# Altium PCB PCB2.PcbDoc
Units mm, origin at the board's own origin, x right, y up, seen from the top; angles counter-clockwise.
Board outline 160 x 110 mm, 2 copper layers (Top Layer, Bottom Layer), stack 1.895 mm thick; 57 components, 72 nets, 172 pads, 41 vias.
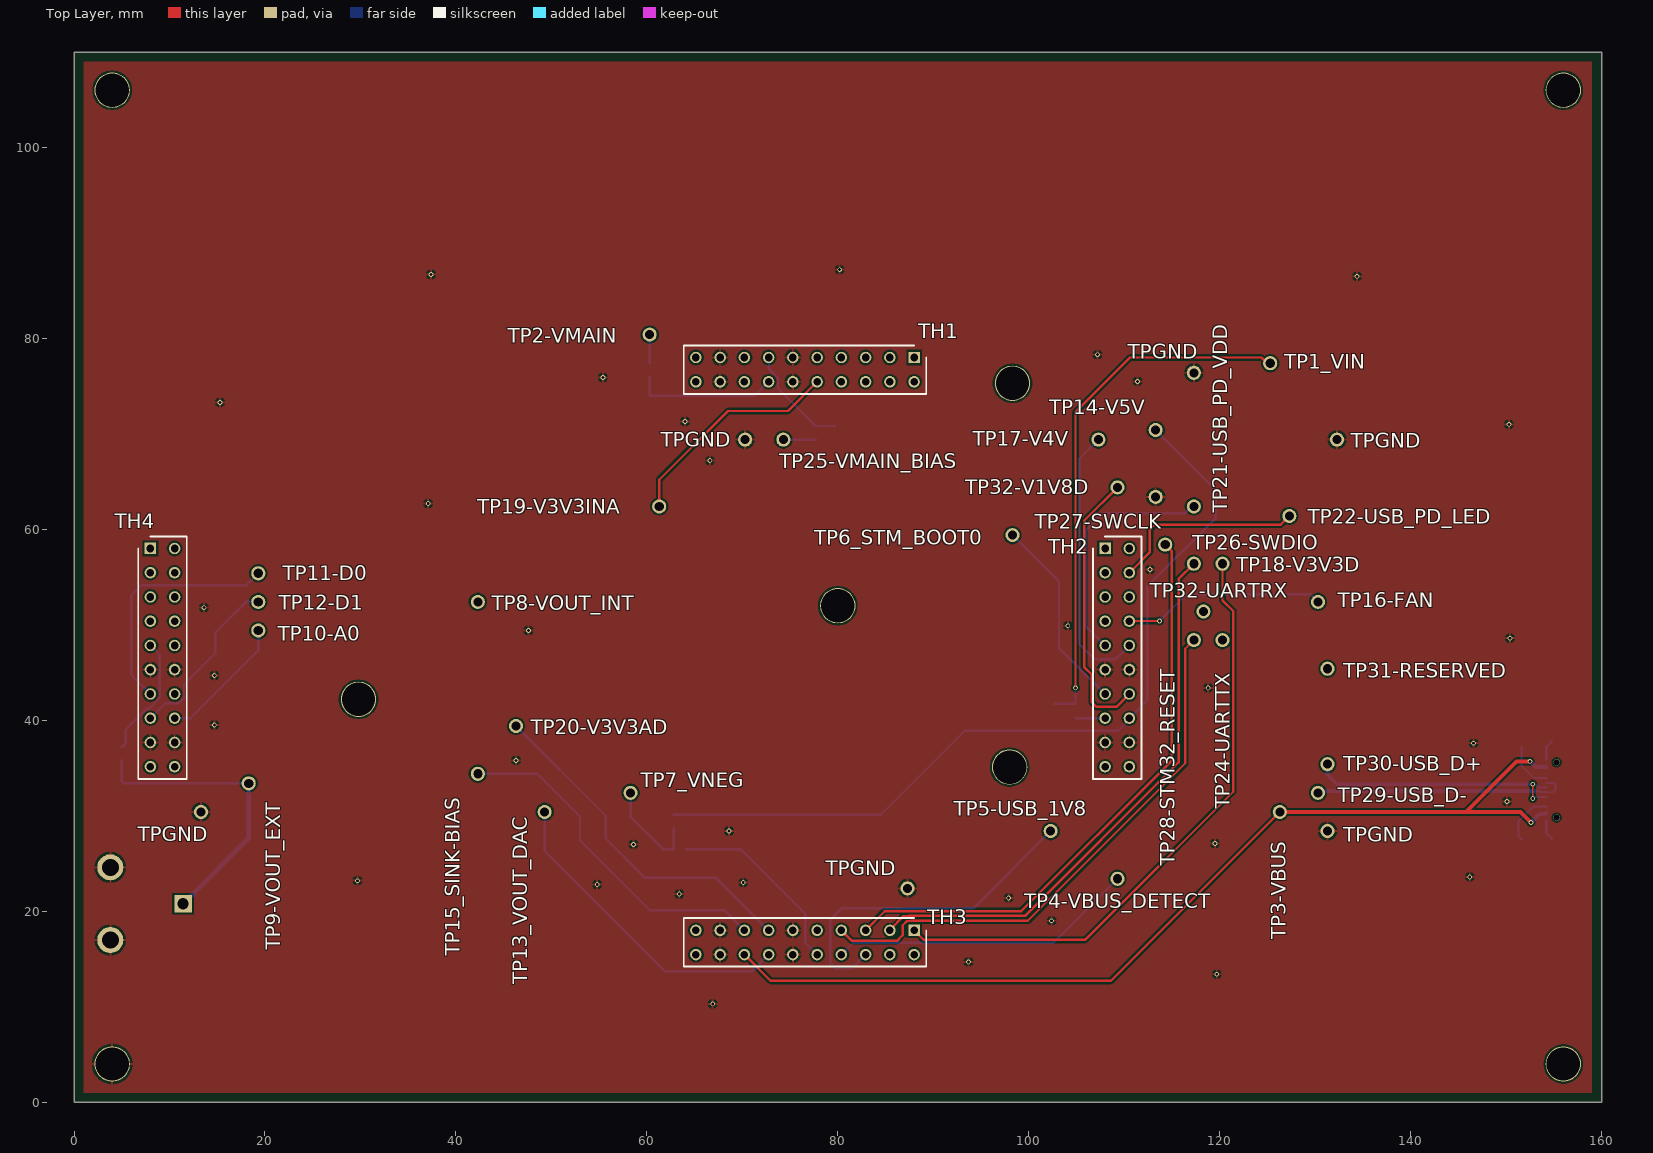
[diagram p0: Top Layer view]
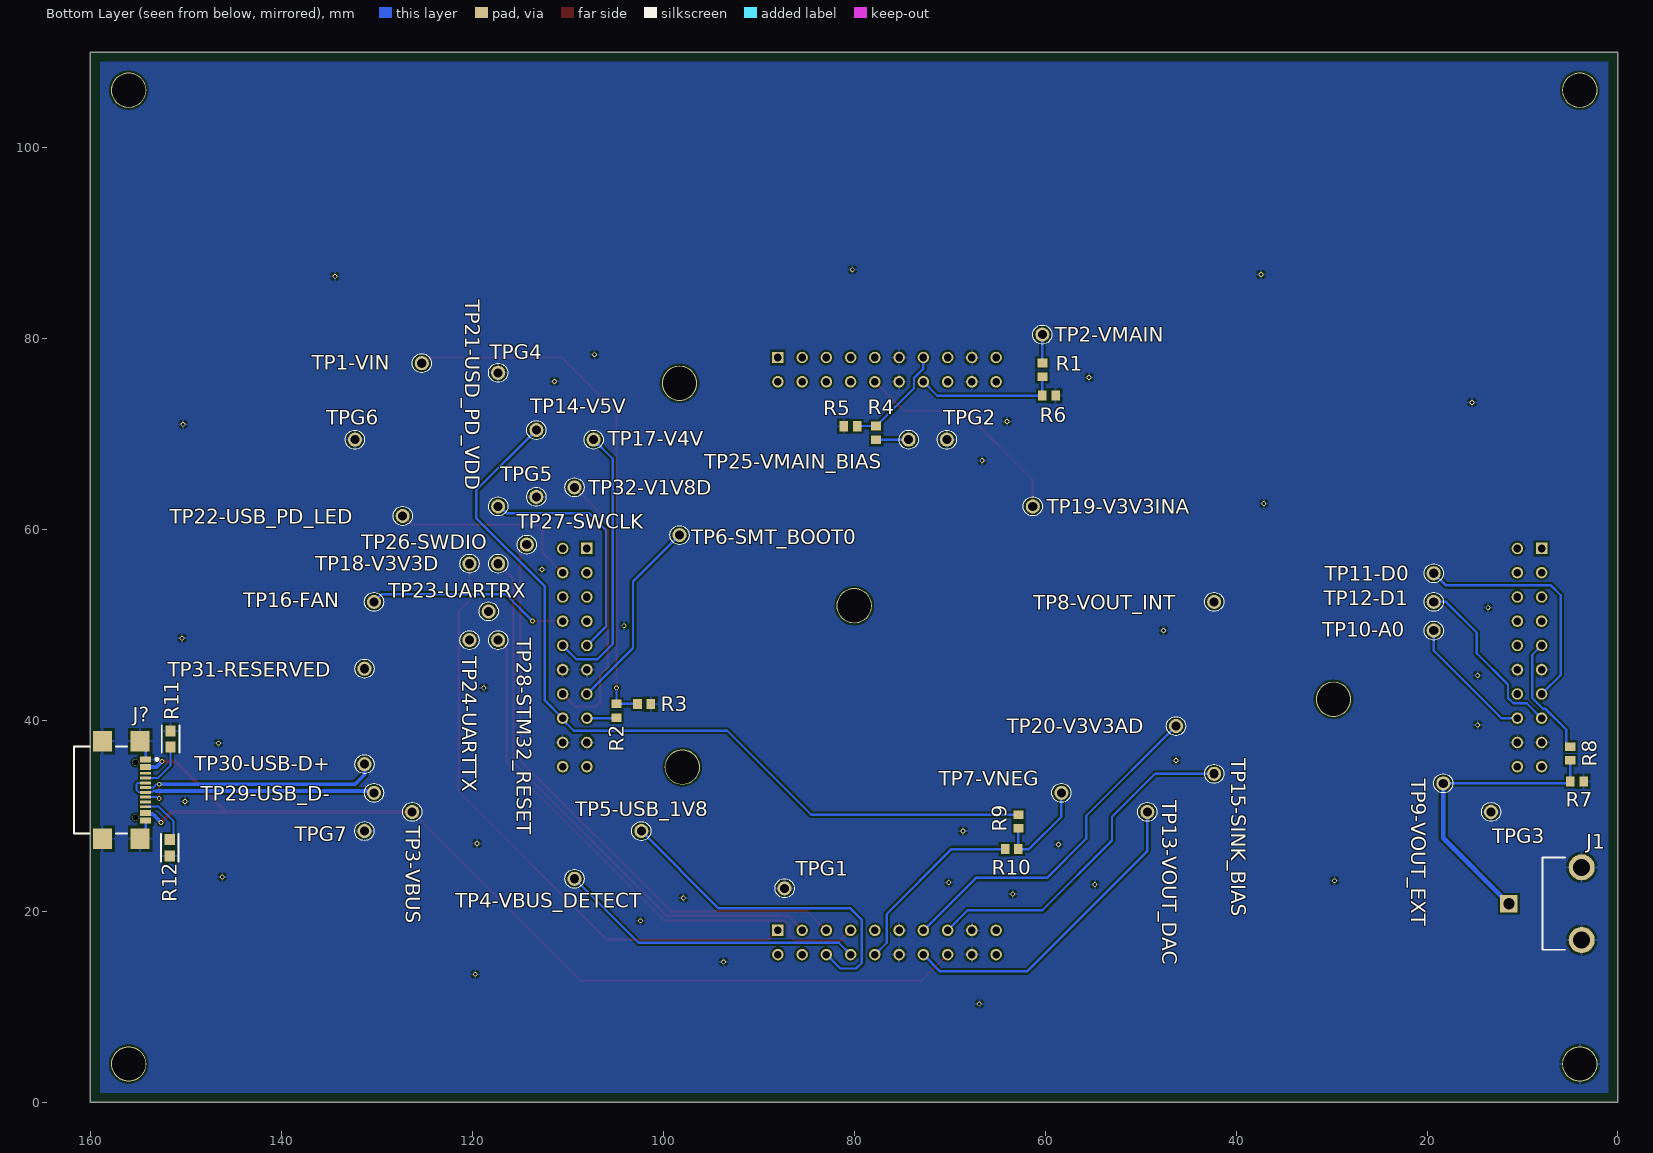
[diagram p1: Bottom Layer view, seen from below]
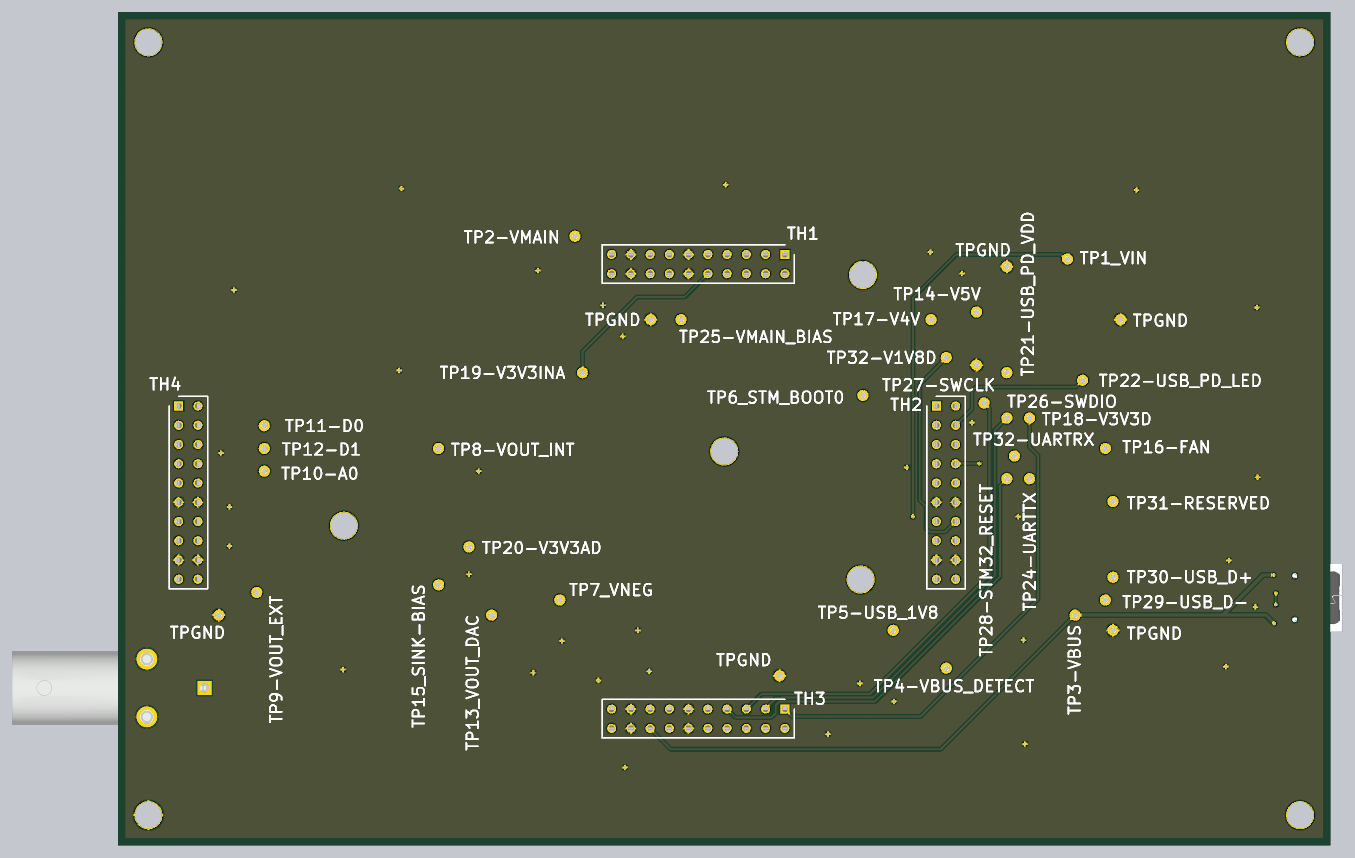
[diagram p2: 3D render of the assembled board from above, using the file's embedded part models]
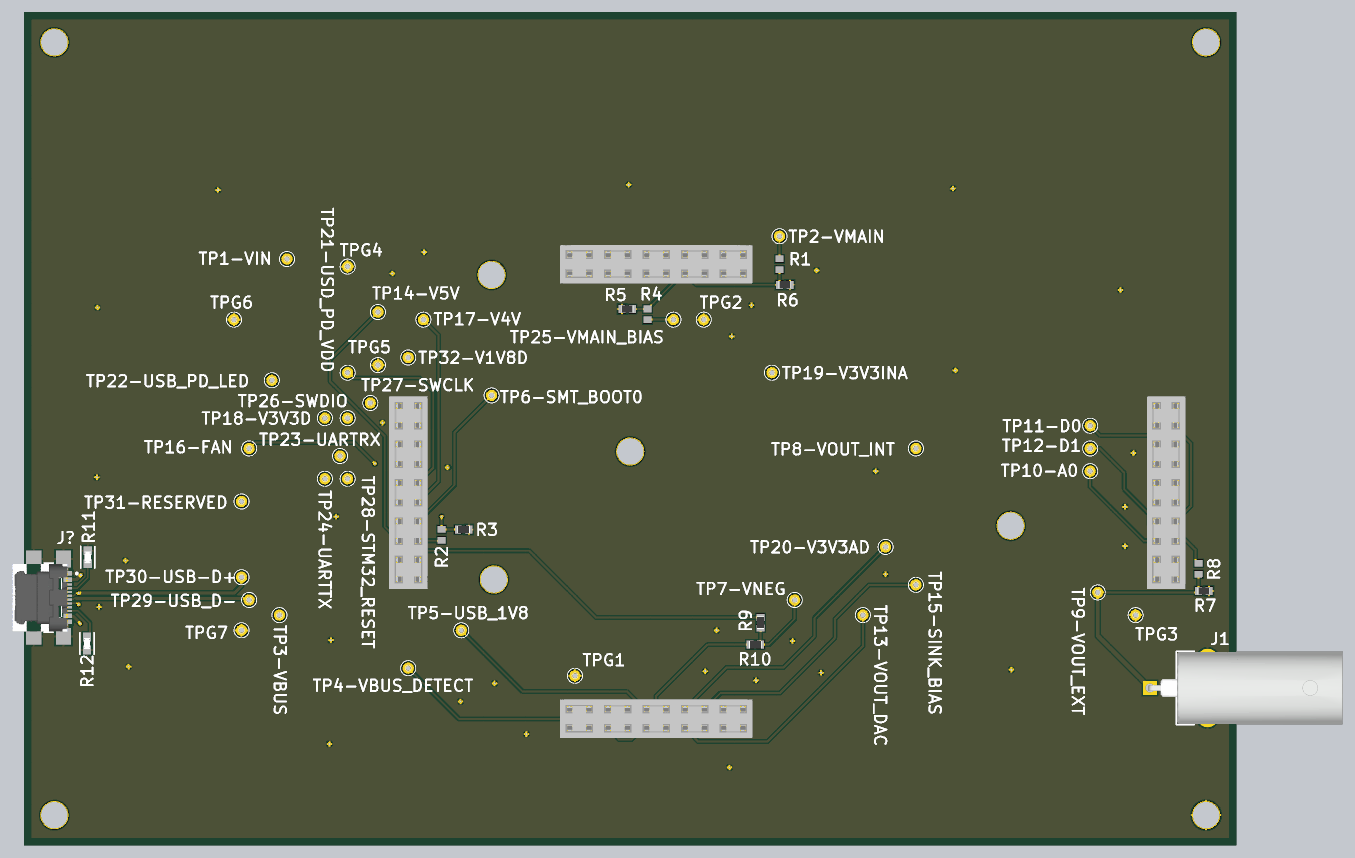
[diagram p3: 3D render of the assembled board from below, using the file's embedded part models]

## Layer stack, top to bottom
Top Solder: solder mask 0.0102, Solder Resist, Dk 3.5
Top Layer: signal copper 0.0152
Dielectric 1: dielectric 1.865, FR-4, Dk 4.8
Bottom Layer: signal copper 0.0152
Bottom Solder: solder mask 0.0102, Solder Resist, Dk 3.5

## Board outline
0,0 0,110 160,110 160,0

## Design rules (kind name [scope] priority, off if disabled: settings)
Clearance [All] p1: gap=0.2 ignorepadtopadclearanceinfootprint=FALSE except(0.12: Arc-Arc Arc-Track Track-Track)
DiffPairsRouting [All] p1: maxlimit=0.6 minlimit=0.1 mostfreqgap=0.2 toplayer_minwidth=0.1 toplayer_maxwidth=0.6 toplayer_prefwidth=0.12 bottomlayer_minwidth=0.1 bottomlayer_maxwidth=0.6 bottomlayer_prefwidth=0.12 maxuncoupledlength=12.7
HoleSize [All] p1: absolutevalues=TRUE maxlimit=4 minlimit=0.025 maxpercent=80.000 minpercent=20.000
MinimumSolderMaskSliver [All] p1: minsoldermaskwidth=0.2
PolygonConnect [All] p1: connectstyle=Relief reliefconductorwidth=0.254 reliefentries=4 polygonreliefangle="90 Angle" airgapwidth=0.254
RoutingVias [All] p1: holewidth=0.3 width=0.5 viastyle="Through Hole" minholewidth=0.3 minwidth=0.5 maxholewidth=0.3 maxwidth=0.5
SilkToSilkClearance [All] p1: silktosilkclearance=0.2
SilkToSolderMaskClearance [IsPad] p1: minsilkscreentomaskgap=0.2 clearancetoexposedcopper=TRUE
SolderMaskExpansion [All] p1: expansion=0.102 istentingtop=FALSE
SupplyNets "Schematic Supply Nets" [InNet('GND')] p1: voltage=0.000
Width [All] p1: maxlimit=0.6 minlimit=0.12 preferedwidth=0.2
25 further rules are at their usual default settings.

## Classes and differential pairs
component class U_TH4: TH4
component class U_TH3: TH3
component class U_TH2: TH2
component class U_TH1: TH1
component class Top: J1 J? R1 R2 R3 R4 R5 R6 R7 R8 R9 R10 R11 R12 TP1-VIN TP2-VMAIN TP3-VBUS TP4-VBUS_DETECT TP5-USB_1V8 TP6-SMT_BOOT0 TP7-VNEG TP8-VOUT_INT TP9-VOUT_EXT TP10-A0 TP11-D0 TP12-D1 TP13-VOUT_DAC TP14-V5V TP15-SINK_BIAS TP16-FAN TP17-V4V TP18-V3V3D TP19-V3V3INA TP20-V3V3AD TP21-USD_PD_VDD TP22-USB_PD_LED TP23-UARTRX TP24-UARTTX TP25-VMAIN_BIAS TP26-SWDIO TP27-SWCLK TP28-STM32_RESET TP29-USB_D- TP30-USB-D+ TP31-RESERVED TP32-V1V8D TPG1 TPG2 TPG3 TPG4 TPG5 TPG6 TPG7
differential pair USB: +USB_P -USB_N

## Components (designator, comment, footprint, x,y, rotation, side; value= is the part's Value field where it differs from the comment)
J1 "5414373-1" FP-5414373-1-MFG -3.06,20.79 r90 bottom
J? "USB4110-GF-A" FP-USB4110-GF-A-MFG 157.9,32.7 r270 bottom
R1 "ERJ-3EKF2002V" RESC1608X55X30ML15T15 60.3,76.7 r270 bottom
R2 "ERJ-3EKF2002V" RESC1608X55X30ML15T15 104.9,41 r90 bottom
R3 "CRCW060310K0FKEA" RESC1609X50X30ML8T20 102,41.7 r0 bottom
R4 "ERJ-3EKF2002V" RESC1608X55X30ML15T15 77.7,70.1 r90 bottom
R5 "CRCW060310K0FKEA" RESC1609X50X30ML8T20 80.4,70.8 r180 bottom
R6 "CRCW060310K0FKEA" RESC1609X50X30ML8T20 59.6,74 r0 bottom
R7 "CRCW060310K0FKEA" RESC1609X50X30ML8T20 4.3,33.6 r0 bottom
R8 "ERJ-3EKF2002V" RESC1608X55X30ML15T15 5,36.525 r270 bottom
R9 "CRCW060310K0FKEA" RESC1609X50X30ML8T20 62.8,29.4 r270 bottom
R10 "CRCW060310K0FKEA" RESC1609X50X30ML8T20 63.5,26.5 r180 bottom
R11 "ERJ-3EKF5101V" FP-ERJ3EK-IPC_A 151.6,38.049 r270 bottom
R12 "ERJ-3EKF5101V" FP-ERJ3EK-IPC_A 151.7,26.651 r90 bottom
TH1 "90151-2120" RHDR20W60P254_2X10_2540X498X870P 88,78 r180 top
TH2 "90151-2120" RHDR20W60P254_2X10_2540X498X870P 108,58 r270 top
TH3 "90151-2120" RHDR20W60P254_2X10_2540X498X870P 88,18 r180 top
TH4 "90151-2120" RHDR20W60P254_2X10_2540X498X870P 8,58 r270 top
TP1-VIN "S13-503" S13503 125.3,77.4 r90 bottom
TP2-VMAIN "S13-503" S13503 60.3,80.4 r90 bottom
TP3-VBUS "S13-503" S13503 126.3,30.4 r90 bottom
TP4-VBUS_DETECT "S13-503" S13503 109.3,23.4 r90 bottom
TP5-USB_1V8 "S13-503" S13503 102.3,28.4 r90 bottom
TP6-SMT_BOOT0 "S13-503" S13503 98.3,59.4 r90 bottom
TP7-VNEG "S13-503" S13503 58.3,32.4 r90 bottom
TP8-VOUT_INT "S13-503" S13503 42.3,52.4 r90 bottom
TP9-VOUT_EXT "S13-503" S13503 18.3,33.4 r90 bottom
TP10-A0 "S13-503" S13503 19.3,49.4 r90 bottom
TP11-D0 "S13-503" S13503 19.3,55.4 r90 bottom
TP12-D1 "S13-503" S13503 19.3,52.4 r90 bottom
TP13-VOUT_DAC "S13-503" S13503 49.3,30.4 r90 bottom
TP14-V5V "S13-503" S13503 113.3,70.4 r90 bottom
TP15-SINK_BIAS "S13-503" S13503 42.3,34.4 r90 bottom
TP16-FAN "S13-503" S13503 130.3,52.4 r90 bottom
TP17-V4V "S13-503" S13503 107.3,69.4 r90 bottom
TP18-V3V3D "S13-503" S13503 120.3,56.4 r90 bottom
TP19-V3V3INA "S13-503" S13503 61.3,62.4 r90 bottom
TP20-V3V3AD "S13-503" S13503 46.3,39.4 r90 bottom
TP21-USD_PD_VDD "S13-503" S13503 117.3,62.4 r90 bottom
TP22-USB_PD_LED "S13-503" S13503 127.3,61.4 r90 bottom
TP23-UARTRX "S13-503" S13503 118.3,51.4 r90 bottom
TP24-UARTTX "S13-503" S13503 120.3,48.4 r90 bottom
TP25-VMAIN_BIAS "S13-503" S13503 74.3,69.4 r90 bottom
TP26-SWDIO "S13-503" S13503 117.3,56.4 r90 bottom
TP27-SWCLK "S13-503" S13503 114.3,58.4 r90 bottom
TP28-STM32_RESET "S13-503" S13503 117.3,48.4 r90 bottom
TP29-USB_D- "S13-503" S13503 130.3,32.4 r90 bottom
TP30-USB-D+ "S13-503" S13503 131.3,35.4 r90 bottom
TP31-RESERVED "S13-503" S13503 131.3,45.4 r90 bottom
TP32-V1V8D "S13-503" S13503 109.3,64.4 r90 bottom
TPG1 "S13-503" S13503 87.3,22.4 r180 bottom
TPG2 "S13-503" S13503 70.3,69.4 r180 bottom
TPG3 "S13-503" S13503 13.3,30.4 r180 bottom
TPG4 "S13-503" S13503 117.3,76.4 r180 bottom
TPG5 "S13-503" S13503 113.3,63.4 r180 bottom
TPG6 "S13-503" S13503 132.3,69.4 r180 bottom
TPG7 "S13-503" S13503 131.3,28.4 r180 bottom

## Footprints (in the part's own frame and the unit in brackets; to place one, negate y for a bottom-side part, rotate by r counter-clockwise, add the part's x,y. Pads: shape width x height; smd on the part's side, far side on the other; paste and mask are expansions set on the pad)
FP-5414373-1-MFG [mm]
  rect 1.84x1.84 hole 1.19 paste-2539.97 mask+0: 1(0,14.48)
  round 2.73 hole 1.78 paste-2539.97 mask+0: 2(-3.81,6.86) 3(3.81,6.86)
  silkscreen extent -4.83,8.6 4.83,10.98, body extent -4.83,-10.92 4.83,14.63, height 9.34
FP-ERJ3EK-IPC_A [mil]
  rect 45.53x41.82 smd paste+0 mask+0: 1(-33.5,0) 2(33.5,0)
  silkscreen extent -56,-37 56,37, body extent -31,-16 31,16, height 22
FP-USB4110-GF-A-MFG [mm]
  rect 2.18x2 smd paste+0 mask+0: 1(-5.11,3.105) 2(5.11,3.105) 3(-5.11,-0.825) 4(5.11,-0.825)
  rect 0.6x1.15 smd paste+0 mask+0: A1-B12(-3.2,3.68) A4-B9(-2.4,3.68) B1-A12(3.2,3.68) B4-A9(2.4,3.68)
  rect 0.3x1.15 smd paste+0 mask+0: A5(-1.25,3.68) A6(-0.25,3.68) A7(0.25,3.68) A8(1.25,3.68) B5(1.75,3.68) B6(0.75,3.68) B7(-0.75,3.68) B8(-1.75,3.68)
  round 0.65 hole 0.65 unplated paste-2539.97 mask+0: ""(-2.89,2.605) ""(2.89,2.605)
  silkscreen extent -4.57,-3.83 4.57,4.99, body extent -5.65,-3.67 5.65,4.01, height 3.21
RESC1608X55X30ML15T15 [mm] "Chip Resistor, 2-Leads, Body 1.60x0.80mm, IPC Low Density"
  rect 0.9x1.05 smd: 1(-0.725,0) 2(0.725,0)
  body extent -0.87,-0.48 0.87,0.48, height 0.55
RESC1609X50X30ML8T20 [mm] "Chip Resistor, 2-Leads, Body 1.65x0.95mm, IPC Low Density"
  rect 0.9x1.05 smd: 1(-0.7,0) 2(0.7,0)
  body extent -0.82,-0.48 0.82,0.48, height 0.5
RHDR20W60P254_2X10_2540X498X870P [mm]
  rect 1.2x1.2 hole 0.8: 1(0,0)
  round 1.2 hole 0.8: 2(0,2.54) 3(2.54,0) 4(2.54,2.54) 5(5.08,0) 6(5.08,2.54) 7(7.62,0) 8(7.62,2.54) 9(10.16,0) 10(10.16,2.54) 11(12.7,0) 12(12.7,2.54) 13(15.24,0) 14(15.24,2.54) 15(17.78,0) 16(17.78,2.54) 17(20.32,0) 18(20.32,2.54) 19(22.86,0) 20(22.86,2.54)
  silkscreen extent -1.27,-1.27 24.13,3.81, body extent -1.27,-1.27 24.13,3.81, height 8.38
S13503 [mm]
  round 1.478 hole 0.95: 1(0,0)
  silkscreen extent -1,-1 1,1, body extent -0.48,-0.49 0.48,0.49, height 2.2

## Part data
J1: library part CMP-03357-000008-1, "CONN BNC JACK R/A 50 OHM PCB", Dielectric Material=Polymethylpentene, Frequency=4GHz, Housing Color=Silver, Insulation Resistance=5GR, Max Operating Temperature=85°C, Min Operating Temperature=-55°C, Operating Frequency="0 to 4 GHz", Package Quantity=50, Voltage Rating=500V, Body Material=Zinc, Body Plating=Nickel, Center Contact Plating=Gold, Connector Type=BNC, Contact Material=Bronze, Contact Plating=Gold, Fastening Type=Bayonet, Gender=Female, Impedance=50R, Insulation Material=Polymethylpentene, Length=25.4mm, Mating Cycles=500, Max Frequency=4GHz, Mount="Through Hole", Number of Ports=1, Number of Positions=1, Orientation="Right Angle", Packaging=Tray, PCB Mount Retention=Without, PCB Mounting Orientation="Right Angle", Polarity=Standard, Radiation Hardening=No, Sealable="No (Without)", Series=-, Termination="Through Hole", Wire/Cable Type=Coaxial
J?: library part CMP-245163-000002-1, "CONN USB 2.0 TYPE-C R/A SMT", Current Rating=3/4.25/1.25/0.25A, Manufacturer=GCT, Package=0, Temperature="-40°C to +85°C", Temperature Range High=+85°C, Temperature Range Low=-40°C, Voltage Rating=20V, Automotive=No, Category=Conn, ComponentLink2Description=Datasheet, ComponentLink2URL=https://gct.co/files/drawings/usb4110.pdf, Conn Orientation="Right Angle", Contact Material=Gold,Nickel, Device Class L1=Connectors, Device Class L2="USB Connectors", Device Class L3=unset, Digikey Description="CONN USB 2.0 TYPE-C R/A SMT", Height=3.46mm, Is Female=yes, Lead Free=Yes, Manufacturer Part Number=USB4110-GF-A, Number of Contacts=16, Octopart=https://octopart.com/usb4110-gf-a-gct-103941985, RoHS=TRUE, Shielding=true, Standoff Height=0.1mm, Usb Standard="USB 2.0"
R1 R2 R4 R8: library part CMP-2000-00318-1, Manufacturer=Panasonic, Resistance=20K, Part Number=ERJ-3EKF2002V
R3 R5 R6 R7 R9 R10: library part CMP-1666-00005-4, "Chip Resistor, 10 KOhm, +/- 1%, 100 mW, -55 to 155 degC, 0603 (1608 Metric), RoHS, Tape and Reel", Manufacturer="Vishay Semiconductor", Max Operating Temperature="155 degC", Min Operating Temperature="-55 degC", Package Quantity=5000, Resistance=10K, Voltage Rating="75 V", ComponentLink1Description="Manufacturer URL", ComponentLink1URL=http://www.vishay.com/, ComponentLink2Description=Datasheet, ComponentLink2URL=https://datasheet.ciiva.com/11809/0900766b80d98afc-11809037.pdf, DatasheetVersion=06/2012, Height="0.45 mm", Length="1.55 mm", Mounting Technology="Surface Mount", PackageDescription="2-Pin Surface Mount Device, Body 1.575 x 0.85 mm", PackageReference=0603, Packaging="Tape and Reel", REACH SVHC=Unknown, RoHSCompliant=true
R11 R12: library part CMP-2000-00540-8, "RES SMD 5.1K OHM 1% 1/10W 0603", Case Code (Imperial)=0603, Case Code (Metric)=1608, Max Operating Temperature=155°C, Max Power Dissipation=100mW, Min Operating Temperature=-55°C, Package Quantity=1, Resistance=5.1kR, Resistance Tolerance=1%, Resistor Type="Thick Film", Temperature Coefficient=100ppm/°C, Voltage Rating=75V, Case/Package=0603, Construction=Rectangular, Contact Plating=Tin, Depth=0.8mm, Features="Automotive AEC-Q200", Height=0.022inch, Lead Free="Lead Free", Length=1.6mm, Military Standard=Not, Mount="Surface Mount", Number of Terminations=2, Packaging="Tape and Reel", Power Rating=100mW, Radiation Hardening=No, Reach SVHC Compliant=Yes, RoHS Compliant=Yes, Series=ERJ, Size Code=0603, Termination=SMD/SMT, Tolerance=1%, Voltage Rating (DC)=75V, Weight=7.1E-05oz, Width=0.8mm
TH1 TH2 TH3 TH4: "Connector", Manufacturer_Name=Molex, Mouser Part Number=538-90151-2120, Datasheet Link=https://www.molex.com/pdm_docs/sd/901512120_sd.pdf, Height=8.7mm, Manufacturer_Part_Number=90151-2120, Mouser Price/Stock=https://www.mouser.co.uk/ProductDetail/Molex/90151-2120?qs=XmV31zLAuMHqFInYdcmaXg%3D%3D
TP1-VIN TP2-VMAIN TP3-VBUS TP4-VBUS_DETECT TP5-USB_1V8 TP6-SMT_BOOT0 TP7-VNEG TP8-VOUT_INT TP9-VOUT_EXT TP10-A0 TP11-D0 TP12-D1 TP13-VOUT_DAC TP14-V5V TP15-SINK_BIAS TP16-FAN TP17-V4V TP18-V3V3D TP19-V3V3INA TP20-V3V3AD TP21-USD_PD_VDD TP22-USB_PD_LED TP23-UARTRX TP24-UARTTX TP25-VMAIN_BIAS TP26-SWDIO TP27-SWCLK TP28-STM32_RESET TP29-USB_D- TP30-USB-D+ TP31-RESERVED TP32-V1V8D TPG1 TPG2 TPG3 TPG4 TPG5 TPG6 TPG7: "Connector", Manufacturer_Name=Harwin, Mouser Part Number=855-S13-503, Datasheet Link=https://cdn.harwin.com/pdfs/S13-503.pdf, Height=12.8mm, Manufacturer_Part_Number=S13-503, Mouser Price/Stock=https://www.mouser.co.uk/ProductDetail/Harwin/S13-503?qs=ulE8k0yEMYZquhAzSGBeOA%3D%3D

## Free pads (board coordinates)
  round 3.7 hole 3.5: 3(4,4) 3(4,106) 3(29.8,42.2) 3(80,52) 3(98,35.1) 3(98.3,75.3) 3(156,4) 3(156,106)

## Via types
v1: diameter 0.5, hole 0.3, Top Layer to Bottom Layer, 41 vias

## Nets (pads, with @x,y where several pads share a name; then routed paths per layer and width w, separated by ;. In a path a pad name is that pad's centre, name@x,y a point inside that pad or via, vN(x,y) a via of type N, cw(c..) or ccw(c..) an arc to the next point about the centre after c; other vN are vias at no path point)
GND: J1.2 J1.3 J?.1 J?.2 J?.3 J?.4 J?.A1-B12 J?.B1-A12 pad.3@4,4 R3.1 R5.1 R6.1 R7.1 R11.1 R12.1 TH1.11 TH1.12 TH1.17 TH1.18 TH2.11 TH2.12 TH2.17 TH2.18 TH3.11 TH3.12 TH3.17 TH3.18 TH4.11 TH4.12 TH4.17 TH4.18 TPG1.1 TPG2.1 TPG3.1 TPG4.1 TPG5.1 TPG6.1 TPG7.1 | length 4.3
  Bottom Layer w0.254: J?.B1-A12 154.22,28.165 J?.2 ; J?.A1-B12 154.22,37.235 J?.1
  other v1: 66.9,10.3 119.7,13.4 93.7,14.7 102.4,19 97.9,21.4 63.4,21.8 54.8,22.8 70.1,23 29.7,23.2 146.2,23.6 58.6,27 119.5,27.1 68.6,28.4 150.1,31.5 46.3,35.8 146.6,37.6 14.7,39.5 118.8,43.4 14.7,44.7 150.4,48.6 47.6,49.4 104.1,49.9 13.6,51.8 112.7,55.8 37.1,62.7 66.6,67.2 150.3,71 64,71.3 15.3,73.3 111.4,75.5 55.4,75.9 107.2,78.3 134.4,86.5 37.4,86.7 80.2,87.2
NetJ1_1: J1.1 R7.2 R8.2 TP9-VOUT_EXT.1 | length 31
  Bottom Layer w0.254: R8.2 R7.2 5.2,33.4 TP9-VOUT_EXT.1
  Bottom Layer w0.5: J1.1 18.3,27.67 TP9-VOUT_EXT.1
NetJ?_A4-B9: J?.A4-B9 J?.B4-A9 TH3.16 TP3-VBUS.1 | length 104.2
  Top Layer w0.254: TH3.16 72.98,12.7 108.6,12.7 TP3-VBUS.1
  Top Layer w0.4: TP3-VBUS.1 145.8,30.4 ; v1(152.5,35.7) 151.1,35.7 145.8,30.4 ; v1(152.6,29.3) 151.5,30.4 145.8,30.4
  Bottom Layer w0.4: v1(152.5,35.7) 153.1,35.1 J?.A4-B9 ; v1(152.6,29.3) 153.245,29.945 153.245,29.966 153.479,30.2 154.12,30.2 J?.B4-A9
NetJ?_A5: J?.A5 R11.2 | length 5.1
  Bottom Layer w0.2: R11.2 151.6,35.278 152.928,33.95 J?.A5
NetJ?_B5: J?.B5 R12.2 | length 5.6
  Bottom Layer w0.2: R12.2 151.3,27.902 151.3,29.4 152.85,30.95 J?.B5
NetR1_1: R1.1 TP2-VMAIN.1 | length 3
  Bottom Layer w0.254: R1.1 TP2-VMAIN.1
NetR1_2: R1.2 R6.2 TH1.14 | length 15
  Bottom Layer w0.254: R1.2 R6.2 71.3,74 TH1.14
NetR2_1: R2.1 TH2.15 | length 3.1
  Bottom Layer w0.254: R2.1 104.955,40.22 TH2.15
NetR2_2: R2.2 R3.2 TP1-VIN.1 | length 55.8
  Top Layer w0.254: v1(104.9,43.4) 104.9,72.3 110.6,78 124.369,78 124.969,77.4 TP1-VIN.1
  Bottom Layer w0.254: R3.2 102.725,41.725 R2.2 v1(104.9,43.4)
NetR4_1: R4.1 TP25-VMAIN_BIAS.1 | length 3.4
  Bottom Layer w0.254: TP25-VMAIN_BIAS.1 77.675,69.4 R4.1
NetR4_2: R4.2 R5.2 TH1.13 | length 11.3
  Bottom Layer w0.254: TH1.13 72.76,76.847 73.741,75.866 73.741,74.784 77.302,71.223 77.302,71.148 77.625,70.825 R4.2 79.675,70.825 R5.2
NetR8_1: R8.1 TH4.9 | length 12.8
  Bottom Layer w0.254: R8.1 5.075,37.25 5.398,37.573 5.398,39.005 7.594,41.201 7.828,41.201 8.981,42.354 8.981,46.859 TH4.9
NetR9_2: R9.2 R10.2 TP7-VNEG.1 | length 10.6
  Bottom Layer w0.254: TP7-VNEG.1 58.3,29.9 61.7,26.5 R10.2 R9.2
NetR10_1: R10.1 TH3.10 | length 20
  Bottom Layer w0.254: R10.1 69.8,26.5 76.6,19.7 76.6,16.7 TH3.10
NetTH1_1: TH1.1
NetTH1_2: TH1.2
NetTH1_3: TH1.3
NetTH1_4: TH1.4
NetTH1_5: TH1.5
NetTH1_6: TH1.6
NetTH1_7: TH1.7
NetTH1_8: TH1.8
NetTH1_9: TH1.9
NetTH1_10: TH1.10 TP19-V3V3INA.1 | length 23.6
  Top Layer w0.254: TP19-V3V3INA.1 61.3,65.2 68.5,72.4 74.78,72.4 TH1.10
NetTH1_16: TH1.16
NetTH1_19: TH1.19
NetTH1_20: TH1.20
NetTH2_1: TH2.1
NetTH2_2: TH2.2
NetTH2_3: TH2.3
NetTH2_4: TH2.4 TP22-USB_PD_LED.1 | length 20.6
  Top Layer w0.254: TH2.4 112.7,57.62 112.7,60 113.2,60.5 126.4,60.5 TP22-USB_PD_LED.1
NetTH2_5: TH2.5
NetTH2_6: TH2.6
NetTH2_8: TH2.8 TP16-FAN.1 | length 21.3
  Top Layer w0.254: TH2.8@110.55,50.39 TH2.8 110.56,50.4 v1(113.7,50.4)
  Bottom Layer w0.254: v1(113.7,50.4) 116.5,53.2 129.5,53.2 TP16-FAN.1
NetTH2_9: TH2.9 TP21-USD_PD_VDD.1 | length 25.2
  Bottom Layer w0.254: TH2.9 106,49.84 106,59.9 107.8,61.7 116.416,61.7 117.116,62.4 TP21-USD_PD_VDD.1
NetTH2_10: TH2.10 TP17-V4V.1 | length 28.7
  Bottom Layer w0.254: TP17-V4V.1 105.3,67.4 105.3,48 106.9,46.4 109.1,46.4 TH2.10
NetTH2_13: TH2.13 TP6-SMT_BOOT0.1 | length 20.7
  Bottom Layer w0.254: TP6-SMT_BOOT0.1 103.177,54.523 103.177,47.583 TH2.13
NetTH2_14: TH2.14 TP32-V1V8D.1 | length 29
  Top Layer w0.254: TP32-V1V8D.1 105.8,60.9 105.8,45.6 106.6,44.8 106.6,41.9 107.1,41.4 109.18,41.4 TH2.14
NetTH2_19: TH2.19
NetTH2_20: TH2.20
NetTH3_1: TH3.1 TP18-V3V3D.1 | length 64.6
  Top Layer w0.254: TH3.1 89,17 105.9,17 121.42,32.52 121.42,51.442 120.3,52.562 TP18-V3V3D.1
NetTH3_2: TH3.2
NetTH3_3: TH3.3 TP26-SWDIO.1 | length 59
  Top Layer w0.254: TH3.3 85.46,18.06 86.9,19.5 87.482,19.5 87.49,19.508 99.608,19.508 115.7,35.6 115.7,54.8 TP26-SWDIO.1
NetTH3_4: TH3.4
NetTH3_5: TH3.5 TP27-SWCLK.1 | length 62.3
  Top Layer w0.254: TH3.5 84.92,20 86.682,20 86.69,20.008 87.271,20.008 87.279,20.016 99.216,20.016 115,35.8 115,57.7 TP27-SWCLK.1
NetTH3_6: TH3.6 TP5-USB_1V8.1 | length 36
  Bottom Layer w0.254: TH3.6 81.46,14 79.8,14 79.2,14.6 79.2,19.1 80.4,20.3 94.2,20.3 TP5-USB_1V8.1
NetTH3_7: TH3.7 TP28-STM32_RESET.1 | length 58.1
  Top Layer w0.254: TH3.7 81.48,16.9 86.2,16.9 86.8,17.5 86.8,18.539 87.242,18.981 87.681,18.981 87.7,19 99.9,19 116.4,35.5 116.4,47.5 TP28-STM32_RESET.1
NetTH3_8: TH3.8 TP4-VBUS_DETECT.1 | length 32.2
  Bottom Layer w0.254: TH3.8 81.62,16.7 102.6,16.7 TP4-VBUS_DETECT.1
NetTH3_9: TH3.9
NetTH3_13: TH3.13 TP20-V3V3AD.1 | length 36.7
  Bottom Layer w0.254: TP20-V3V3AD.1 55.7,30 55.7,27.6 59.8,23.5 67.26,23.5 TH3.13
NetTH3_14: TH3.14 TP13-VOUT_DAC.1 | length 33.5
  Bottom Layer w0.254: TP13-VOUT_DAC.1 49.3,26.3 61.9,13.7 71,13.7 TH3.14
NetTH3_15: TH3.15 TP15-SINK_BIAS.1 | length 36.2
  Bottom Layer w0.254: TP15-SINK_BIAS.1 48.5,34.4 53,29.9 53,27.4 60.3,20.1 68.12,20.1 TH3.15
NetTH3_19: TH3.19
NetTH3_20: TH3.20
NetTH4_1: TH4.1
NetTH4_2: TH4.2
NetTH4_3: TH4.3
NetTH4_4: TH4.4
NetTH4_5: TH4.5
NetTH4_6: TH4.6
NetTH4_7: TH4.7
NetTH4_8: TH4.8
NetTH4_10: TH4.10
NetTH4_13: TH4.13 TP11-D0.1 | length 25.4
  Bottom Layer w0.254: TH4.13 6,44.76 6,53.1 7.033,54.133 18.033,54.133 TP11-D0.1
NetTH4_14: TH4.14
NetTH4_15: TH4.15 TP12-D1.1 | length 18.4
  Bottom Layer w0.254: TH4.15 9.559,41.779 10.946,41.779 11.521,42.354 11.521,43.741 14.8,47.02 14.8,49.2 18,52.4 TP12-D1.1
NetTH4_16: TH4.16 TP10-A0.1 | length 13.8
  Bottom Layer w0.254: TH4.16 12.22,40.22 19.3,47.3 TP10-A0.1
NetTH4_19: TH4.19
NetTH4_20: TH4.20
USB_N: J?.A7 J?.B7 TP29-USB_D-.1 | length 26.8
  Bottom Layer w0.2: 153.1,32.6 153.4,32.6 153.5,32.5 154.17,32.5 J?.A7 154.23,32.46 154.96,32.46 155.2,32.7 155.2,33.3 155.05,33.45 J?.B7
  Bottom Layer w0.4: TP29-USB_D-.1 130.5,32.6 153.1,32.6
USB_P: J?.A6 J?.B6 TP30-USB-D+.1 | length 27.6
  Top Layer w0.2: v1(152.8,31.8) v1(152.8,33.3)
  Bottom Layer w0.2: v1@152.7,33.3 153.1,33.3 153.45,32.95 J?.A6 ; v1(152.8,31.8) 152.95,31.95 J?.B6
  Bottom Layer w0.4: TP30-USB-D+.1 131.3,34.3 132.3,33.3 v1@152.7,33.3
V5V: R9.1 TH2.16 TP14-V5V.1 | length 88.6
  Bottom Layer w0.254: R9.1 84.5,30.1 93.3,38.9 109.386,38.9 110.54,40.054 TH2.16 112.4,42.08 112.4,54 119.6,61.2 119.6,64.1 TP14-V5V.1
pads on no net: J?. J?.A8 J?.B8 TH1.15 TH2.7 TP8-VOUT_INT.1 TP23-UARTRX.1 TP24-UARTTX.1 TP31-RESERVED.1

## Polygon pours and split planes (outlines as drawn)
GND on Bottom Layer "GND_L02_P000" (solid, pour order 0): 1,1 159,1 159,109 1,109
GND on Top Layer "GND_L01_P003" (solid, pour order 3): 1,1 1,109 159,109 159,1

## Silkscreen, mask and mechanical layers (free items; w line width, h text height)
Top Overlay:
  text "TP2-VMAIN" at 45.454,79.554 h1.52
  text "TPGND" at 110.354,77.854 h1.52
  text "TP1_VIN" at 126.754,76.808 h1.52
  text "TP14-V5V" at 102.154,72.054 h1.52
  text "TP17-V4V" at 94.154,68.754 h1.52
  text "TPGND" at 61.454,68.654 h1.52
  text "TPGND" at 133.754,68.554 h1.52
  text "TP25-VMAIN_BIAS" at 73.854,66.408 h1.52
  text "TP32-V1V8D" at 93.354,63.654 h1.52
  text "TP21-USB_PD_VDD" at 120.792,61.754 h1.52 r90
  text "TP19-V3V3INA" at 42.254,61.654 h1.52
  text "TP22-USB_PD_LED" at 129.254,60.608 h1.52
  text "TP27-SWCLK" at 100.654,60.054 h1.52
  text "TP6_STM_BOOT0" at 77.554,58.408 h1.52
  text "TP26-SWDIO" at 117.154,57.854 h1.52
  text "TP18-V3V3D" at 121.754,55.554 h1.52
  text "TP11-D0" at 21.854,54.654 h1.52
  text "TP32-UARTRX" at 112.654,52.854 h1.52
  text "TP16-FAN" at 132.354,51.854 h1.52
  text "TP12-D1" at 21.454,51.554 h1.52
  text "TP8-VOUT_INT" at 43.754,51.508 h1.52
  text "TP10-A0" at 21.354,48.354 h1.52
  text "TP31-RESERVED" at 132.954,44.454 h1.52
  text "TP20-V3V3AD" at 47.854,38.554 h1.52
  text "TP30-USB_D+" at 132.954,34.708 h1.52
  text "TP7_VNEG" at 59.354,33.008 h1.52
  text "TP29-USB_D-" at 132.354,31.408 h1.52
  text "TP24-UARTTX" at 121.046,30.754 h1.52 r90
  text "TP5-USB_1V8" at 92.154,30.008 h1.52
  text "TPGND" at 6.654,27.354 h1.52
  text "TPGND" at 132.954,27.254 h1.52
  text "TP28-STM32_RESET" at 115.292,24.754 h1.52 r90
  text "TPGND" at 78.754,23.754 h1.52
  text "TP4-VBUS_DETECT" at 99.554,20.308 h1.52
  text "TP3-VBUS" at 126.946,17.054 h1.52 r90
  text "TP9-VOUT_EXT" at 21.592,15.954 h1.52 r90
  text "TP15_SINK-BIAS" at 40.392,15.354 h1.52 r90
  text "TP13_VOUT_DAC" at 47.492,12.354 h1.52 r90
Mechanical 1:
  the board outline again, w0.254